# Altium PCB PCB_3pha40V_V2.PcbDoc
Units mm, origin at the board's own origin, x right, y up, seen from the top; angles counter-clockwise.
Board outline 151.25 x 104.25 mm, 2 copper layers (Top Layer, Bottom Layer); 69 components, 45 nets, 173 pads, 0 vias.
Unrouted connection lines stored in the file: 9.
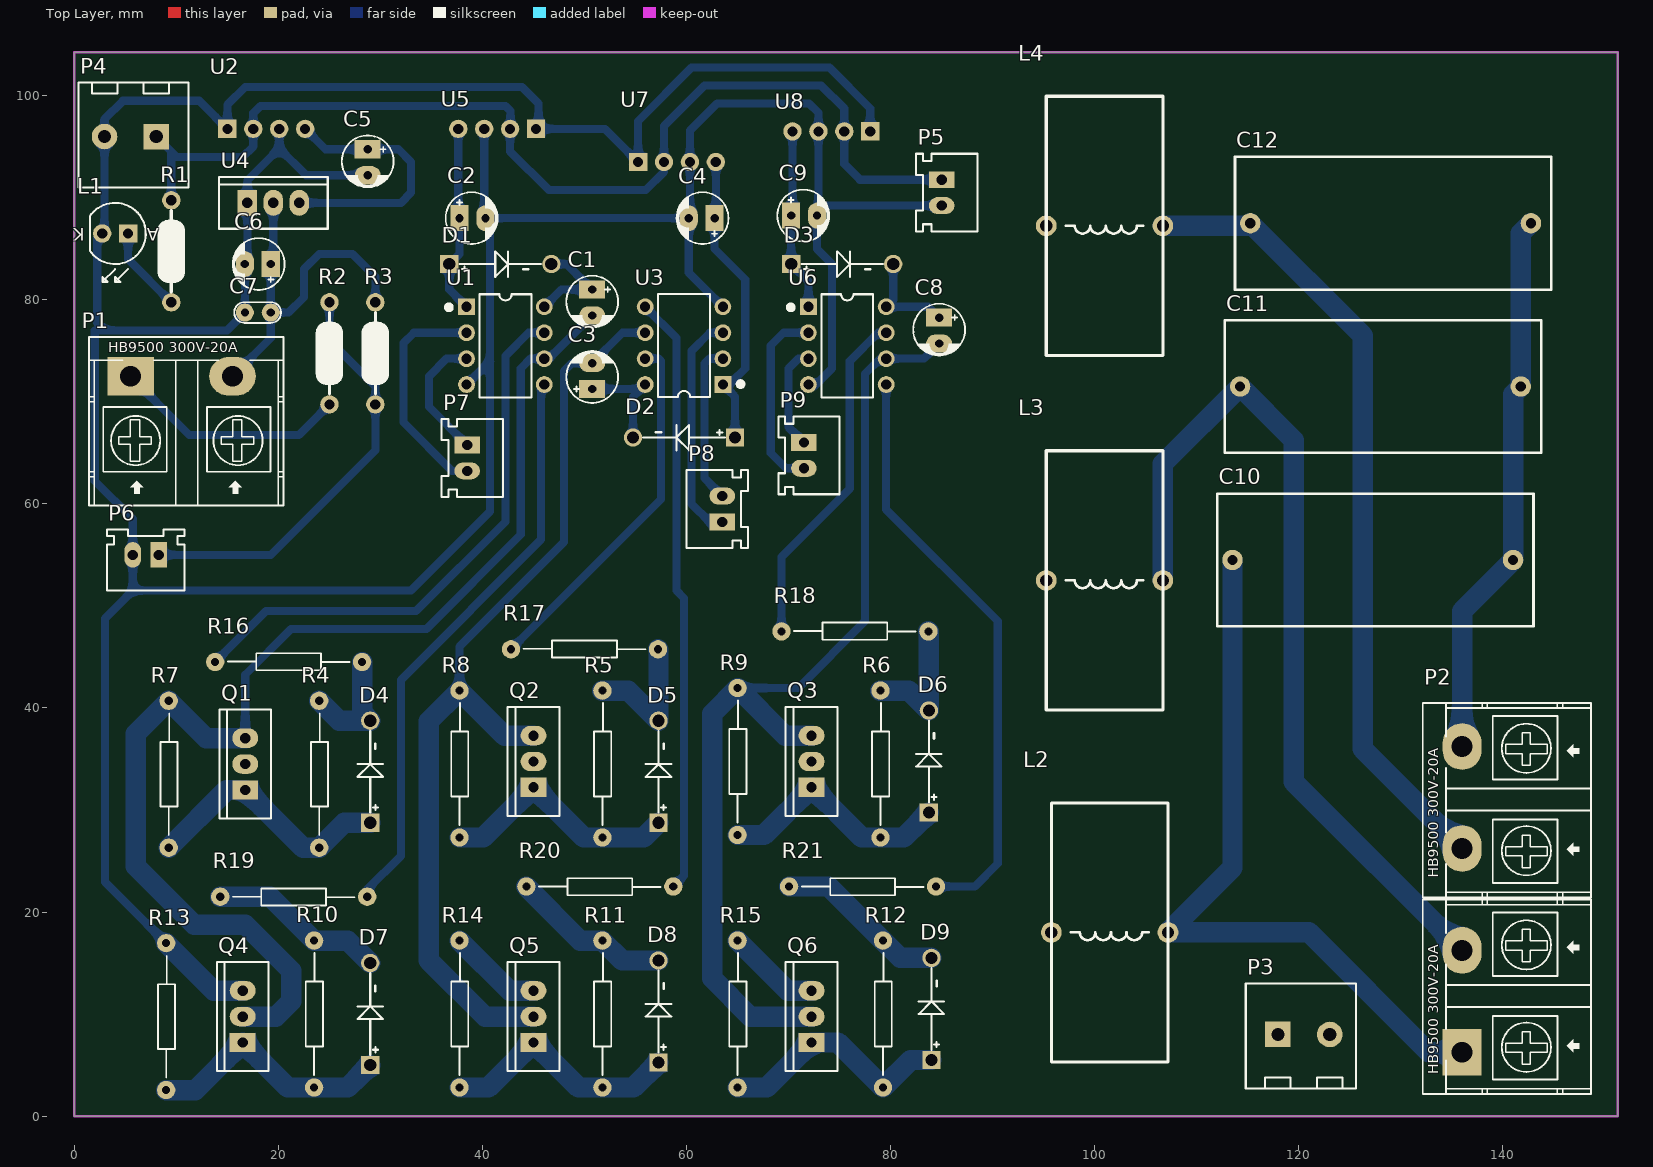
[diagram p0: Top Layer view]
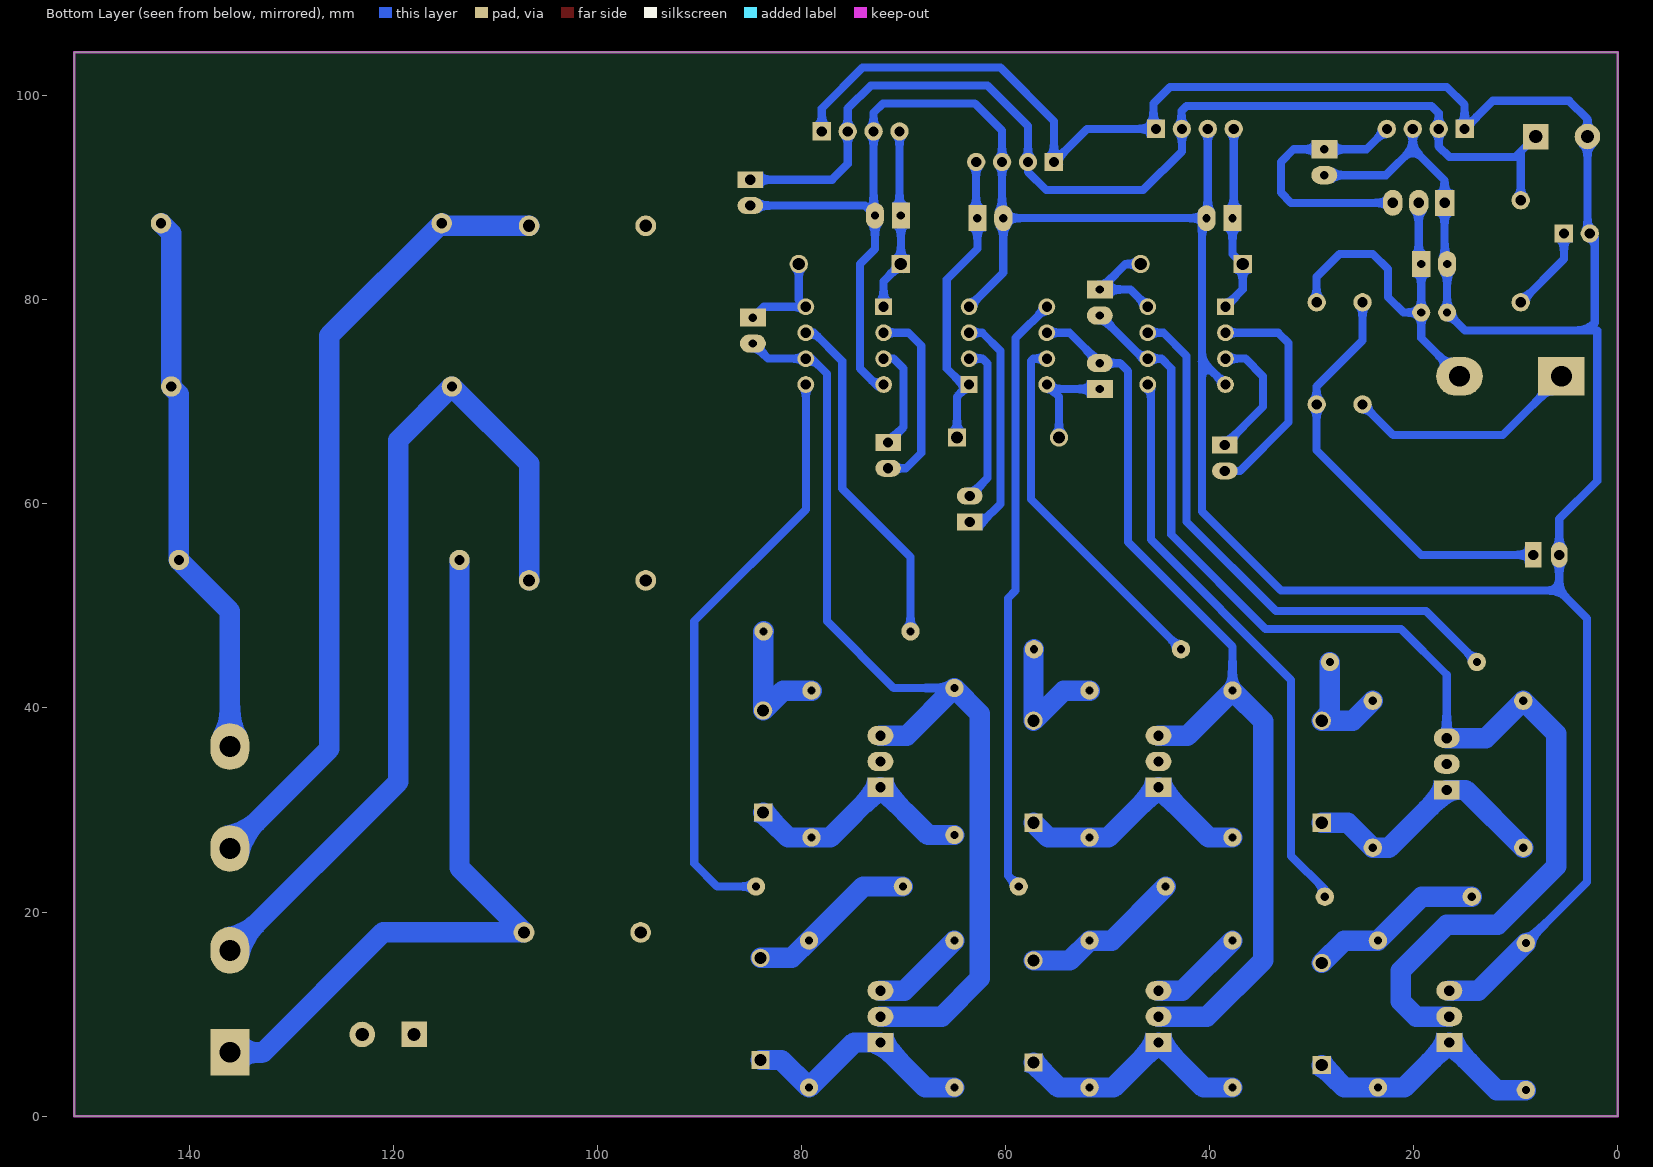
[diagram p1: Bottom Layer view, seen from below]

## Layer stack, top to bottom
Top Solder: solder mask 0.0102, Solder Resist, Dk 3.5
Top Layer: signal copper 0.0356
Dielectric 1: dielectric 0.32, FR-4, Dk 4.8
Bottom Layer: signal copper 0.0356
Bottom Solder: solder mask 0.0102, Solder Resist, Dk 3.5

## Board outline
0,0 151.25,0 151.25,104.25 0,104.25

## Design rules (kind name [scope] priority, off if disabled: settings)
Clearance [All] p1: gap=0.254
PolygonConnect [All] p1: connectstyle=Relief reliefconductorwidth=0.254 reliefentries=4 polygonreliefangle="90 Angle" airgapwidth=0.254
RoutingVias [All] p1: holewidth=0.711 width=1.27 viastyle="Through Hole" minholewidth=0.711 minwidth=1.27 maxholewidth=0.711 maxwidth=1.27
SolderMaskExpansion [All] p1: expansion=0.102
Width [All] p1: maxlimit=2 minlimit=0.5 preferedwidth=1
30 further rules are at their usual default settings.

## Components (designator, comment, footprint, x,y, rotation, side; value= is the part's Value field where it differs from the comment)
C1 "2.2uF" CP1/2 50.75,81 r270 top
C2 "10uF" CP1/2 37.75,88 r0 top
C3 "2.2uF" CP1/2 50.75,71.25 r90 top
C4 "10uF" CP1/2 62.75,88 r180 top
C5 "10uF" CP1/2 28.75,94.75 r270 top
C6 "100uF" CP1/2 19.25,83.5 r180 top
C7 "0.1F" CN1 19.25,78.75 r180 top
C8 "2.2uF" CP1/2 84.75,78.25 r270 top
C9 "10uF" CP1/2 70.25,88.25 r0 top
C10 "1uF" CP30 113.5,54.5 r0 top
C11 "1uF" CP30 114.25,71.5 r0 top
C12 "1uF" CP30 115.25,87.5 r0 top
D1 "1N5819" diode_dip 41.75,83.5 r0 top
D2 "1N5819" diode_dip 59.75,66.5 r180 top
D3 "1N5819" diode_dip 75.25,83.5 r0 top
D4 "1N5819" diode_dip 29,33.75 r90 top
D5 "1N5819" diode_dip 57.25,33.75 r90 top
D6 "1N5819" diode_dip 83.75,34.75 r90 top
D7 "1N5819" diode_dip 29,10 r90 top
D8 "1N5819" diode_dip 57.25,10.25 r90 top
D9 "1N5819" diode_dip 84,10.5 r90 top
L1 "Led_Blue" led_blue_t/h_5mm 4,86.5 r180 top
L2 "Inductor" IND_SINE 101.25,17.5 r0 top
L3 "Inductor" IND_SINE 100.75,52 r0 top
L4 "Inductor" IND_SINE 100.75,86.75 r0 top
P1 "Domino 2 pin" HED2A 5.5,72.5 r0 top
P2 "Terminal_4p" "Terminal 4pin" 136,6.25 r90 top
P3 "Domino 2 pin" Domino_2pin_5.08mm 120.5,8 r0 top
P4 "Domino 2 pin" Domino_2pin_5.08mm 5.5,96 r180 top
P5 "Domino 2 pin" CON2 85.5,90.5 r270 top
P6 "Domino 2 pin" CON2 7,54.5 r180 top
P7 "Domino 2 pin" CON2 39,64.5 r270 top
P8 "Domino 2 pin" CON2 63,59.5 r90 top
P9 "Domino 2 pin" CON2 72,64.75 r270 top
Q1 "IRF540" TO-220 16.75,34.5 r90 top
Q2 "IRF540" TO-220 45,34.75 r90 top
Q3 "IRF540" TO-220 72.25,34.75 r90 top
Q4 "IRF540" TO-220 16.5,9.75 r90 top
Q5 "IRF540" TO-220 45,9.75 r90 top
Q6 "IRF540" TO-220 72.25,9.75 r90 top
R1 "1K" resistor_t/h_1/4w 9.5,84.75 r90 top
R2 "2M" resistor_t/h_1/4w 25,74.75 r270 top
R3 "120K" resistor_t/h_1/4w 29.5,74.75 r270 top
R4 "10 Ohm" res_1wat 24,33.5 r270 top
R5 "10 Ohm" res_1wat 51.75,34.5 r270 top
R6 "10 Ohm" res_1wat 79,34.5 r270 top
R7 "10K" res_1wat 9.25,33.5 r270 top
R8 "10K" res_1wat 37.75,34.5 r270 top
R9 "10K" res_1wat 65,34.75 r270 top
R10 "10 Ohm" res_1wat 23.5,10 r270 top
R11 "10 Ohm" res_1wat 51.75,10 r270 top
R12 "10 Ohm" res_1wat 79.25,10 r270 top
R13 "10K" res_1wat 9,9.75 r270 top
R14 "10K" res_1wat 37.75,10 r270 top
R15 "10K" res_1wat 65,10 r270 top
R16 "10 Ohm" res_1wat 21,44.5 r0 top
R17 "10 Ohm" res_1wat 50,45.75 r0 top
R18 "10 Ohm" res_1wat 76.5,47.5 r0 top
R19 "10 Ohm" res_1wat 21.5,21.5 r180 top
R20 "10 Ohm" res_1wat 51.5,22.5 r180 top
R21 "10 Ohm" res_1wat 77.25,22.5 r180 top
U1 "IR2104" DIP-8_2.54_8_t/h 42.25,75.5 r0 top
U2 "Mosun_0505" Mosun_050x 15,96.75 r0 top
U3 "IR2104" DIP-8_2.54_8_t/h 59.75,75.5 r180 top
U4 "LM1117MP-3.3TR" TO-220 19.5,89.5 r0 top
U5 "Mosun_0512" Mosun_050x 45.25,96.75 r180 top
U6 "IR2104" DIP-8_2.54_8_t/h 75.75,75.5 r0 top
U7 "Mosun_0512" Mosun_050x 55.25,93.5 r0 top
U8 "Mosun_0512" Mosun_050x 78,96.5 r180 top

## Footprints (in the part's own frame and the unit in brackets; to place one, negate y for a bottom-side part, rotate by r counter-clockwise, add the part's x,y. Pads: shape width x height; smd on the part's side, far side on the other; paste and mask are expansions set on the pad)
CN1 [mil]
  round 70 hole 31: 1(0,0) 2(100,0)
  silkscreen extent -40,-40 141,40, body extent -60,-30 170,37, height 265
CON2 [mm]
  rect 1.65x2.5 hole 1: 1(-1.27,-0.5)
  oval 1.65x2.5 hole 1: 2(1.27,-0.5)
  silkscreen extent -3.81,-3 3.81,3, body extent -3.7,-2.87 3.7,2.88, height 7
CP1/2 [mil] "Tu hoa < 22uF/16>50V"
  rect 70x100 hole 32: 1(0,0)
  oval 70x100 hole 32: 2(100,0)
  silkscreen extent -53,-100 146,100, body extent -49,-99 149,99, height 287
CP30 [mm]
  round 2 hole 1: 1(0,0) 2(27.5,0)
  silkscreen extent -1.5,-6.5 29.5,6.5, body extent -1.5,-6.5 29.5,6.5, height 3
diode_dip [mm]
  rect 1.8x1.8 hole 1.2: 1(-5,0)
  round 1.8 hole 1.2: 2(5,0)
  silkscreen extent -4,-1.25 4,1.25, body extent -5.51,-1.5 5.51,1.2, height 2.78
DIP-8_2.54_8_t/h [mm]
  rect 1.65x1.65 hole 1: 1(-3.81,3.81)
  round 1.65 hole 1: 2(-3.81,1.27) 3(-3.81,-1.27) 4(-3.81,-3.81) 5(3.81,-3.81) 6(3.81,-1.27) 7(3.81,1.27) 8(3.81,3.81)
  silkscreen extent -5.89,-5.08 2.54,5.04, body extent -5.08,-5.09 5.08,5.07, height 8.16
Domino_2pin_5.08mm [mm]
  rect 2.5x2.5 hole 1.3: 1(-2.54,0)
  round 2.5 hole 1.3: 2(2.54,0)
  silkscreen extent -5.7,-5.3 5.1,5, body extent -5.68,-5.3 5.08,5, height 14.19
HED2A [mil] "Header 2: 300V-20A, 2 pin, hight 300mil, Pin to Pin 400, Colour Green"
  rect 180x150 hole 80: 1(0.47,0)
  oval 180x150 hole 80: 2(393.7,0)
  silkscreen extent -160,-498 590,152, body extent -197,-502 630,69, height 571
IND_SINE [mm]
  round 2.032 hole 1.2: 1(-5.5,0.5) 2(5.93,0.5)
  silkscreen extent -5.5,-12.2 5.93,13.2, body extent -8.52,-14.91 8.52,15.91, height 1.02
led_blue_t/h_5mm [mm]
  rect 1.8x1.8 hole 1: 1(-1.27,0)
  round 1.8 hole 1: 2(1.27,0)
  silkscreen extent -3,-3 2.49,4.75, body extent -2.9,-2.9 2.5,2.9, height 8.72
Mosun_050x [mm]
  rect 1.8x1.8 hole 1: 1(0,0)
  round 1.8 hole 1: 2(2.54,0) 3(5.08,0) 4(7.62,0)
  body extent -2,-1.4 9.6,4.6, height 13.86
res_1wat [mm]
  round 1.8 hole 0.8: 1(-7.2,0) 2(7.2,0)
  silkscreen extent -5.97,-0.81 5.97,0.86, body extent -7.55,-2.02 7.55,2.02, height 5.02
resistor_t/h_1/4w [mm]
  round 1.8 hole 1: 1(-5,0) 2(5,0)
  silkscreen extent -4,-1.25 4,1.25, body extent -5.32,-1.2 5.34,1.2, height 2.5
"Terminal 4pin" [mil]
  rect 180x150 hole 80: 1(0,0)
  oval 180x150 hole 80: 2(393.23,0) 3(786.46,0) 4(1179.69,0)
  silkscreen extent -160,-498 1348,152, body extent -197,-502 1388,69, height 571
TO-220 [mil]
  rect 75x100 hole 40: 1(-100,0)
  oval 75x100 hole 40: 2(0,0) 3(100,0)
  silkscreen extent -210,-100 210,100, body extent -195,-83 195,94, height 760

## Part data
C1 C2 C3 C4 C5 C6 C8 C9: library part "capacitor_polar 6.3x11mm", "capacitor polar"
C7 C10 C11 C12: library part capacitor_non_polar, "capacitor non polar"
D1 D2 D3 D4 D5 D6 D7 D8 D9: library part diode, "diode"
L1: library part led_blue, "led_blue"
P1: library part terminal_2p, "domino 2 pin"
P3 P4: library part domino_2pin, "domino 2 pin"
P5 P6 P7 P8 P9: library part CON2p, "domino 2 pin"
Q1 Q2 Q3 Q4 Q5 Q6: library part Mosfet
R1 R2 R3 R4 R5 R6 R7 R8 R9 R10 R11 R12 R13 R14 R15 R16 R17 R18 R19 R20 R21: library part resistor, "resistor"
U1 U3 U6: library part FAN7842
U2 U5 U7 U8: library part Mosun_0x0x
U4: "3.3V 800mA Low-Dropout Linear Regulator"

## Nets (pads, with @x,y where several pads share a name; then routed paths per layer and width w, separated by ;. In a path a pad name is that pad's centre, name@x,y a point inside that pad or via, vN(x,y) a via of type N, cw(c..) or ccw(c..) an arc to the next point about the centre after c; other vN are vias at no path point)
+2.5V: C6.1 C7.1 P1.2 R3.1 U4.2 | length 36.3
  Bottom Layer w0.8: P1.2 19.25,76.25 C7.1 ; U4.2 19.5,83.75 C6.1 C7.1 ; R3.1 29.5,82.25 27.25,84.5 24,84.5 22.5,83 22.5,80.25 21,78.75 C7.1
+5V: P4.1 P5.1 R1.2 U2.2 U5.2 U7.2 U8.2 | length 106.2
  Bottom Layer w0.8: P4.1 9.5,94.54 ; R1.2 9.5,94.54 ; P5.1 76.98,91.77 75.46,93.29 U8.2 75.46,98.733 73.193,101 61.75,101 57.79,97.04 U7.2 57.79,92.54 56,90.75 46.5,90.75 42.71,94.54 U5.2 42.75,96.79 42.75,98.5 42.25,99 18.25,99 17.54,98.29 U2.2 17.54,95.04 16.5,94 10.04,94 9.5,94.54
+5VP: C5.1 U2.4 U4.3 | length 26.1
  Bottom Layer w0.8: U4.3 32,89.5 33,90.5 33,93.5 31.75,94.75 C5.1 24.62,94.75 U2.4
+12V1: C2.1 D1.1 U1.1 U5.4 | length 18.6
  Bottom Layer w0.8: U5.4 37.63,88.12 C2.1 37.75,84.5 D1.1 36.75,81 U1.1
+12V2: C4.1 D2.1 U3.1 U7.4 | length 30.1
  Bottom Layer w0.8: U7.4 62.87,88.12 C4.1 62.75,85 65.75,82 65.75,73.25 64.19,71.69 U3.1 64.75,70.5 D2.1
+12V3: C9.1 D3.1 U6.1 U8.4 | length 17.9
  Bottom Layer w0.8: U8.4 70.38,88.38 C9.1 D3.1 71.94,81.81 U6.1
GND: C2.2 C4.2 C5.2 C6.2 C7.2 C9.2 L1.2 P3.1 P4.2 P5.2 P6.2 Q4.3 Q5.3 Q6.3 R13.1 R14.1 R15.1 U1.4 U2.1 U2.3 U3.4 U4.1 U5.1 U5.3 U6.4 U7.1 U7.3 U8.1 U8.3 | length 427.7
  Bottom Layer w0.8: R13.1 3,22.95 3,48.77 5.73,51.5 ; U2.3 20.08,94.83 ; C5.2 22.7,92.21 20.08,94.83 ; U1.4 40.75,74 ; U5.3 40.17,88.12 C2.2 ; U3.4 60.21,82.66 C4.2 ; U6.4 72.13,71.5 72.5,71.5 74.25,73.25 74.25,83.5 72.79,84.96 C9.2 C9.2@72.92,88.38 ; U8.1 78,98.75 74,102.75 73.023,102.75 73.019,102.754 61.731,102.754 61.727,102.75 60.5,102.75 55.25,97.5 U7.1 52,96.75 U5.1 45.5,97 45.5,99.25 43.881,100.869 16.75,100.869 15,99.119 U2.1 12.25,99.5 4.75,99.5 2.96,97.71 P4.2 2.96,86.73 L1.2 2.25,86.02 2.25,77.75 3,77 ; P5.2 73.77,89.23 C9.2@72.92,88.38 ; P3.1@117.67,7.71 P3.1 ; 3,77 2,77 2,62.25 5.73,58.52 P6.2 5.73,51.5 ; 3,77 14.96,77 C7.2 C6.2 16.96,83.75 U4.1 16.96,91.71 20.08,94.83 ; 5.73,51.5 33,51.5 40.75,59.25 40.75,87.54 C2.2 ; C2.2 C4.2 ; C4.2 60.33,88.12 U7.3 60.33,96.58 63,99.25 72,99.25 72.92,98.33 U8.3 C9.2@72.92,88.38
  Bottom Layer w2: R13.1 13.66,12.29 Q4.3 ; R14.1 42.66,12.29 Q5.3 ; R15.1 69.91,12.29 Q6.3
NetC1_1: C1.1 D1.2 U1.8 | length 10.4
  Bottom Layer w0.8: U1.8 47.75,81 C1.1 48.25,83.5 D1.2
NetC1_2: C1.2 L2.1 Q1.3 Q4.2 R7.1 U1.6 | length 118.8
  Bottom Layer w0.8: Q1.3 16.75,43.25 21.25,47.75 34.5,47.75 43.75,57 43.75,73.269 44.711,74.23 U1.6 46.52,74.23 C1.2
  Bottom Layer w2: Q4.2 19.75,9.75 21.25,11.25 21.25,14.25 16.75,18.75 11.75,18.75 6,24.5 6,37.45 R7.1 12.91,37.04 Q1.3
NetC3_1: C3.1 D2.2 U3.8 | length 10.4
  Bottom Layer w0.8: C3.1 U3.8@55.5,71.25 ; D2.2 54.75,70.5 U3.8@55.5,71.25 ; U3.8 U3.8@55.5,71.25
NetC3_2: C3.2 L3.1 Q2.3 Q5.2 R8.1 U3.6 | length 94.3
  Bottom Layer w0.8: R8.1 37.75,46 48,56.25 48,73 48.79,73.79 C3.2 53.73,76.77 U3.6
  Bottom Layer w2: Q5.2 40.25,9.75 34.75,15.25 34.75,38.7 R8.1 42.16,37.29 Q2.3
NetC8_1: C8.1 D3.2 U6.8 | length 10.1
  Bottom Layer w0.8: D3.2 80.25,80 U6.8 83.69,79.31 C8.1
NetC8_2: C8.2 L4.1 Q3.3 Q6.2 R9.1 U6.6 | length 97.9
  Bottom Layer w0.8: R9.1 70.95,41.95 77.5,48.5 77.5,72.75 78.98,74.23 U6.6 83.27,74.23 C8.2
  Bottom Layer w2: Q6.2 66.25,9.75 62.5,13.5 62.5,39.45 R9.1 69.66,37.29 Q3.3
NetC10_1: C10.1 L2.2 P2.1 | length 72.8
  Bottom Layer w2: C10.1 113.5,24.32 L2.2 121,18 132.75,6.25 P2.1
NetC10_2: C10.2 C11.2 C12.2 P2.4 | length 54.1
  Bottom Layer w2: P2.4 136,49.5 C10.2 141,70.75 C11.2 141.75,86.5 C12.2
NetC11_1: C11.1 L3.2 P2.2 | length 86.4
  Bottom Layer w2: L3.2 106.68,63.93 C11.1 119.5,66.25 119.5,32.738 P2.2
NetC12_1: C12.1 L4.2 P2.3 | length 78.5
  Bottom Layer w2: L4.2 115,87.25 C12.1 126.25,76.5 126.25,35.976 P2.3
NetD4_1: D4.1 Q1.1 R4.2 R7.2 | length 25.5
  Bottom Layer w2: R7.2 14.91,31.96 Q1.1 22.41,26.3 R4.2 26.45,28.75 D4.1
NetD4_2: D4.2 R4.1 R16.2 | length 11.9
  Bottom Layer w2: R4.1 25.95,38.75 D4.2 28.2,39.55 R16.2
NetD5_1: D5.1 Q2.1 R5.2 R8.2 | length 24.2
  Bottom Layer w2: R8.2 40.09,27.3 Q2.1 49.91,27.3 R5.2 55.8,27.3 D5.1
NetD5_2: D5.2 R5.1 R17.2 | length 13.7
  Bottom Layer w2: R5.1 54.3,41.7 D5.2 57.25,45.7 R17.2
NetD6_1: D6.1 Q3.1 R6.2 R9.2 | length 23.7
  Bottom Layer w2: R9.2 67.59,27.55 Q3.1 77.16,27.3 R6.2 81.3,27.3 D6.1
NetD6_2: D6.2 R6.1 R18.2 | length 13.3
  Bottom Layer w2: R6.1 81.8,41.7 D6.2 83.75,47.45 R18.2
NetD7_1: D7.1 Q4.1 R10.2 R13.2 | length 24.7
  Bottom Layer w2: R13.2 11.84,2.55 Q4.1 20.91,2.8 R10.2 26.8,2.8 D7.1
NetD7_2: D7.2 R10.1 R19.2 | length 17.4
  Bottom Layer w2: R19.2 19.2,21.5 R10.1 26.8,17.2 D7.2
NetD8_1: D8.1 Q5.1 R11.2 R14.2 | length 24.2
  Bottom Layer w2: R14.2 40.59,2.8 Q5.1 49.41,2.8 R11.2 54.8,2.8 D8.1
NetD8_2: D8.2 R11.1 R20.2 | length 16
  Bottom Layer w2: R20.2 49.6,17.2 R11.1 53.7,15.25 D8.2
NetD9_1: D9.1 Q6.1 R12.2 R15.2 | length 23.8
  Bottom Layer w2: R15.2 67.84,2.8 Q6.1 74.84,7.21 R12.2 81.95,5.5 D9.1
NetD9_2: D9.2 R12.1 R21.2 | length 16.8
  Bottom Layer w2: R21.2 73.95,22.5 R12.1 80.95,15.5 D9.2
NetL1_1: L1.1 R1.1 | length 8.5
  Bottom Layer w0.8: L1.1 5.27,83.98 R1.1
NetP1_1: P1.1 R2.2 | length 23.1
  Bottom Layer w0.8: P1.1 11.262,66.75 22,66.75 R2.2
NetP3_2: P3.2 Q1.2 Q2.2 Q3.2
NetP6_1: P6.1 R2.1 R3.2 | length 41.8
  Bottom Layer w0.8: P6.1 19.25,55 29.5,65.25 R3.2 29.5,71.5 25,76 R2.1
NetP7_1: P7.1 U1.3 | length 12.7
  Bottom Layer w0.8: U1.3 36.48,74.23 34.75,72.5 34.75,69.52 P7.1
NetP7_2: P7.2 U1.2 | length 22.6
  Bottom Layer w0.8: U1.2 33.27,76.77 32.25,75.75 32.25,68 37.02,63.23 P7.2
NetP8_1: P8.1 U3.3 | length 22.5
  Bottom Layer w0.8: P8.1 62.27,58.23 60.5,60 60.5,75 62.27,76.77 U3.3
NetP8_2: P8.2 U3.2 | length 15.7
  Bottom Layer w0.8: P8.2 61.75,62.52 61.75,73.75 62.25,74.25 63.54,74.25 U3.2
NetP9_1: P9.1 U6.3 | length 10.2
  Bottom Layer w0.8: P9.1 70,67.52 70,73.25 70.98,74.23 U6.3
NetP9_2: P9.2 U6.2 | length 18.6
  Bottom Layer w0.8: P9.2 69.77,63.48 68.25,65 68.25,75.5 69.52,76.77 U6.2
NetR16_1: R16.1 U1.7 | length 55.1
  Bottom Layer w0.8: R16.1 18.8,49.5 33.5,49.5 42.25,58.25 42.25,74.5 44.52,76.77 U1.7
NetR17_1: R17.1 U3.7 | length 36
  Bottom Layer w0.8: R17.1 57.5,60.45 57.5,74 57.27,74.23 U3.7
NetR18_1: R18.1 U6.7 | length 34
  Bottom Layer w0.8: R18.1 69.3,54.8 76,61.5 76,74 78.77,76.77 U6.7
NetR19_1: R19.1 U1.5 | length 57.4
  Bottom Layer w0.8: R19.1 28.7,22.2 32,25.5 32,42.75 45.75,56.5 45.75,71.38 U1.5
NetR20_1: R20.1 U3.5 | length 58.8
  Bottom Layer w0.8: U3.5 59,76.25 59,51.5 59.75,50.75 59.75,23.55 R20.1
NetR21_1: R21.1 U6.5 | length 58.5
  Bottom Layer w0.8: U6.5 79.56,59.44 90.5,48.5 90.5,24.75 88.25,22.5 R21.1

## Keep-outs
Keep-Out Layer:
  the board outline again, w0.254

## Text inside footprints (layer, text, board x,y; h text height)
L1: Top Overlay "K" at 1,87 h1.2 r180; Top Overlay "A" at 8.25,87 h1.2 r180
P1: Top Overlay "HB9500 300V-20A" at 3.341,74.834 h1.02
P2: Top Overlay "HB9500 300V-20A" at 133.666,4.079 h1.02 r90; Top Overlay "HB9500 300V-20A" at 133.666,23.341 h1.02 r90